# Altium PCB ComBoard2020.PcbDoc
Units mm, origin at the board's own origin, x right, y up, seen from the top; angles counter-clockwise.
Board outline 77.4 x 69.2 mm, 2 copper layers (Top Layer, Bottom Layer), stack 0.325 mm thick; 66 components, 56 nets, 330 pads, 42 vias.
Unrouted connection lines stored in the file: 21.
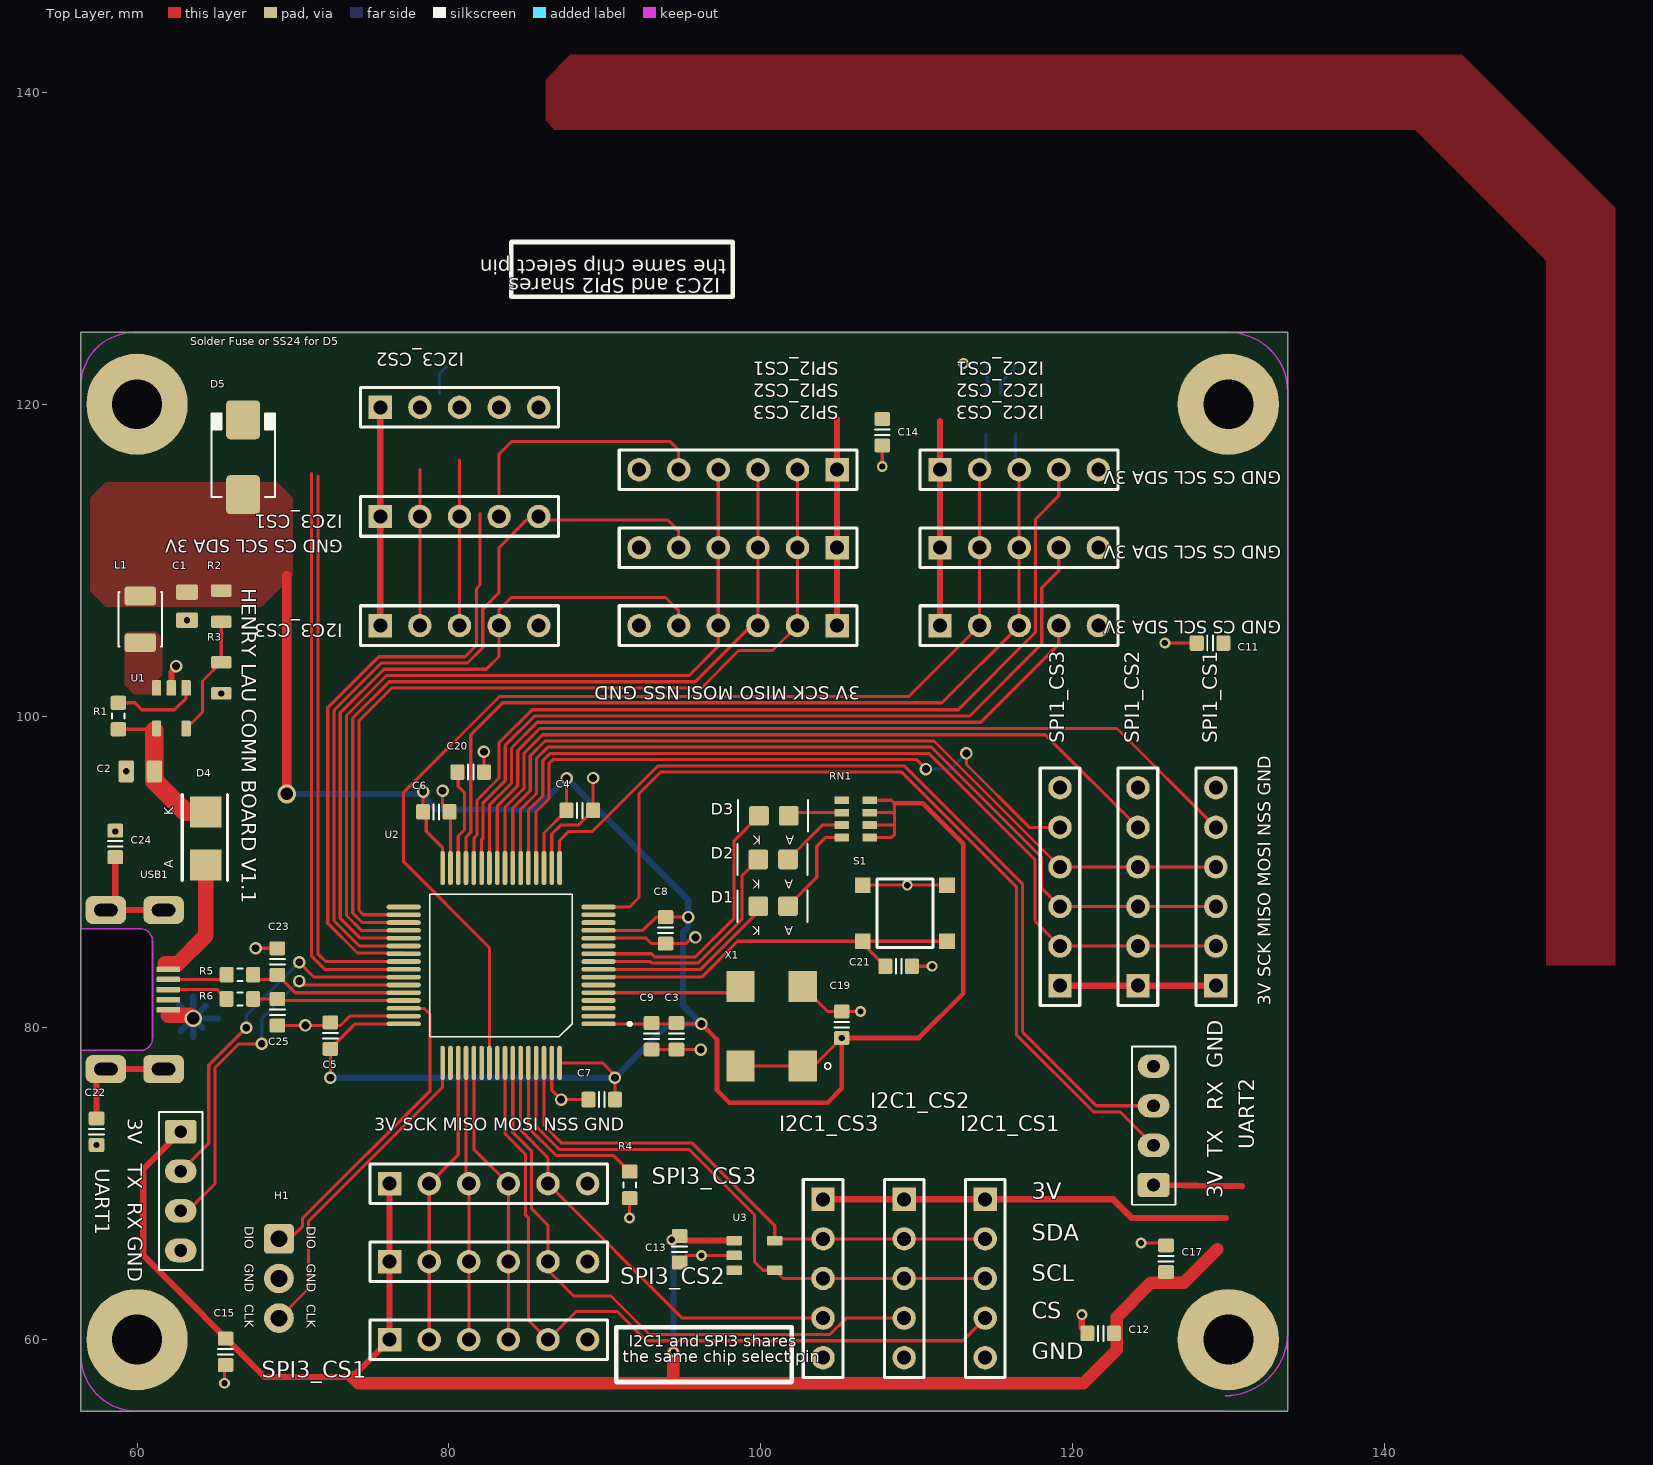
[diagram p0: Top Layer view]
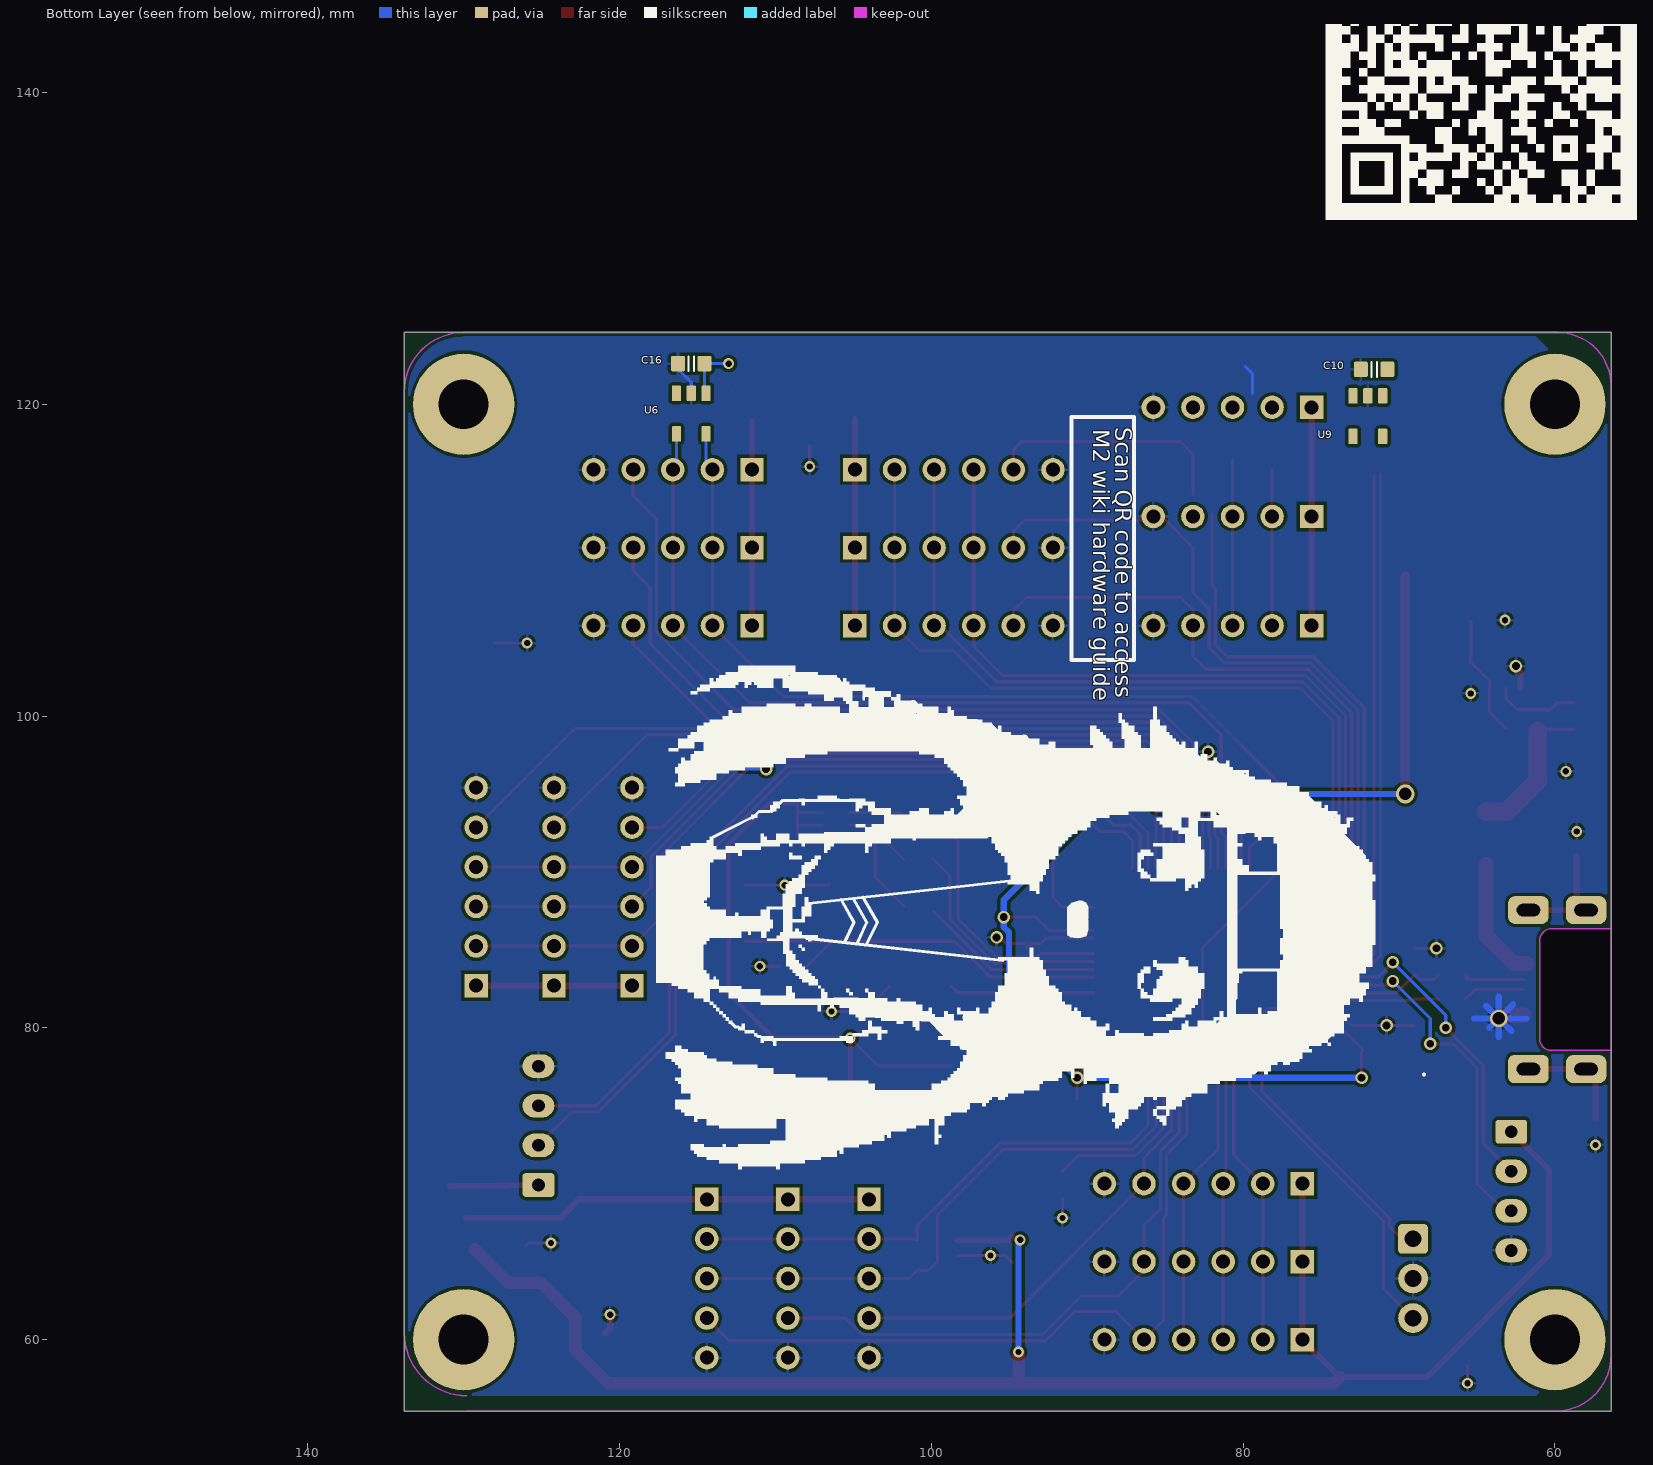
[diagram p1: Bottom Layer view, seen from below]
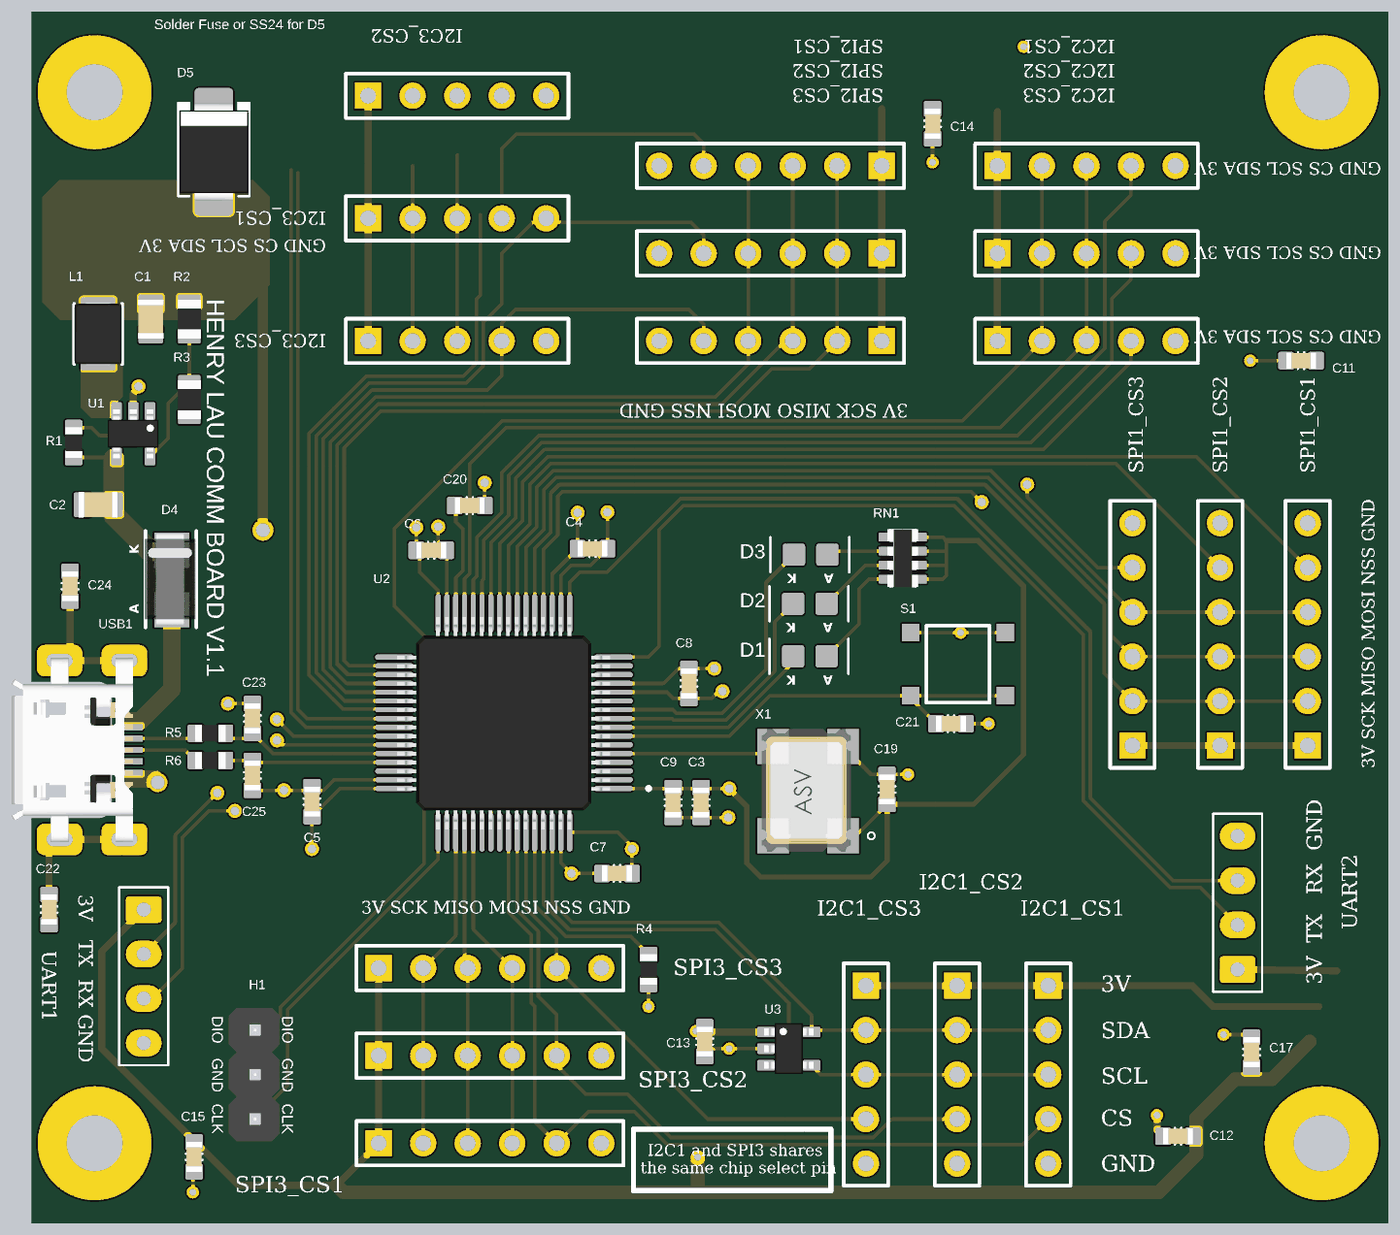
[diagram p2: 3D render of the assembled board from above, using the file's embedded part models]
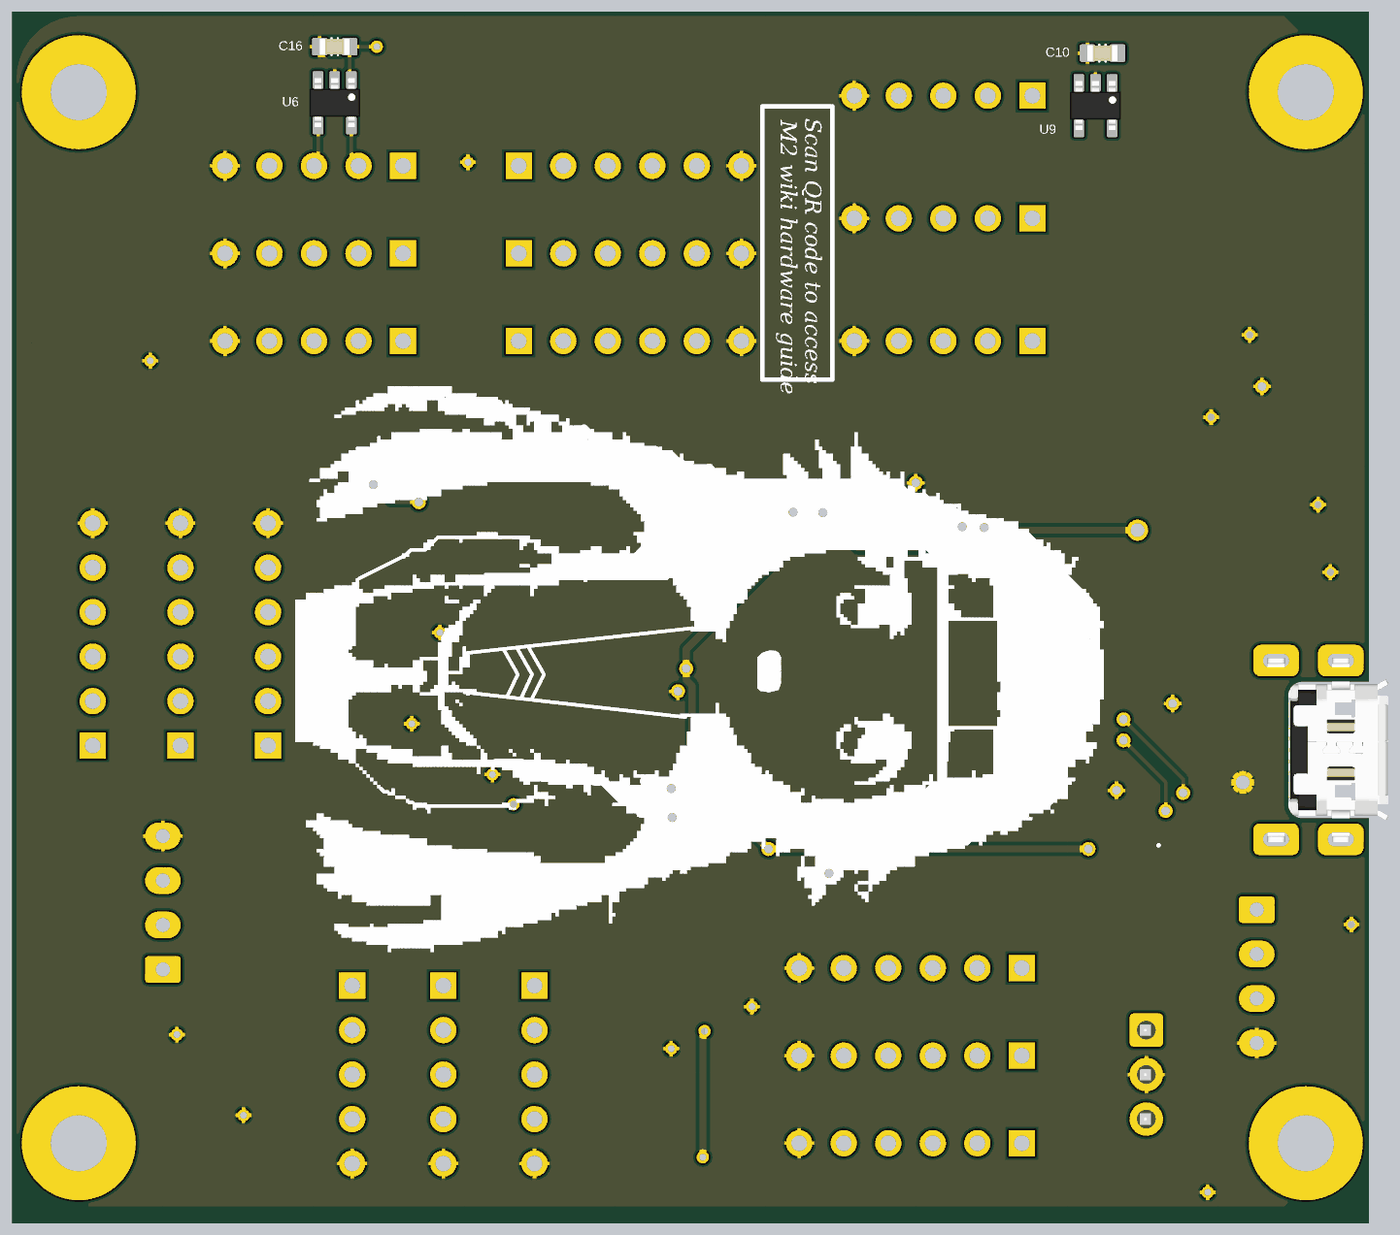
[diagram p3: 3D render of the assembled board from below, using the file's embedded part models]

## Layer stack, top to bottom
Top Solder: solder mask 0.0102, Solder Resist, Dk 3.5
Top Layer: signal copper 0.0356
Dielectric 1: core 0.254, FR-4, Dk 4.2
Bottom Layer: signal copper 0.0356
Bottom Solder: solder mask 0.0102, Solder Resist, Dk 3.5

## Board outline
56.4,124.6 56.4,55.4 133.8,55.4 133.8,124.6

## Design rules (kind name [scope] priority, off if disabled: settings)
Clearance [All] p1: gap=0.2 ignorepadtopadclearanceinfootprint=FALSE
HoleSize [All] p1: absolutevalues=TRUE maxlimit=10 minlimit=0.025 maxpercent=80.000 minpercent=20.000
MinimumSolderMaskSliver [All] p1: minsoldermaskwidth=0.09
PolygonConnect power [InNet('NetL1_1') OR InNet('3V3') OR InComponent('D5')] p1: connectstyle=Direct reliefconductorwidth=0.254 reliefentries=4 polygonreliefangle="90 Angle" airgapwidth=0.254
PolygonConnect [All] p2: connectstyle=Relief reliefconductorwidth=0.2 reliefentries=4 polygonreliefangle="90 Angle" airgapwidth=0.2
RoutingVias [All] p1: holewidth=0.4 width=0.7 viastyle="Through Hole" minholewidth=0.4 minwidth=0.7 maxholewidth=49 maxwidth=50
SilkToSilkClearance [All] p1: silktosilkclearance=0.09
SilkToSolderMaskClearance [IsPad] p1: minsilkscreentomaskgap=0.09 clearancetoexposedcopper=TRUE
SolderMaskExpansion [All] p1: expansion=0.102
Width [All] p1: maxlimit=30 minlimit=0.2 preferedwidth=0.2
26 further rules are at their usual default settings.

## Classes and differential pairs
component class U_STM32F401R: C3 C4 C5 C6 C7 C8 C9 C10 C11 C12 C13 C14 C15 C16 C17 C19 C20 C21 C22 C23 C24 C25 D1 D2 D3 D4 H1 I2C1_CS1 I2C1_CS2 I2C1_CS3 I2C2_CS1 I2C2_CS2 I2C2_CS3 I2C3_CS1 I2C3_CS2 I2C3_CS3 R4 R5 R6 RN1 S1 SPI1_CS1 SPI1_CS2 SPI1_CS3 SPI2_CS1 SPI2_CS2 SPI2_CS3 SPI3_CS1 SPI3_CS2 SPI3_CS3 U2 U3 U6 U9 UART1 UART2 X1
component class U_5V_to_3V3: C1 C2 D5 L1 R1 R2 R3 U1

## Components (designator, comment, footprint, x,y, rotation, side; value= is the part's Value field where it differs from the comment)
C1 "Cap" CAPC2012X135N 63.2,107.049 r90 top value=10u
C2 "Cap" CAPC2012X135N 60.2,96.45 r0 top value=10u
C3 "Cap" CAPC1608X90N 94.599,79.45 r90 top value=1u
C4 "Cap" CAPC1608X90N 88.4,93.945 r180 top value=1u
C5 "Cap" CAPC1608X90N 72.4,79.501 r270 top value=1u
C6 "Cap" CAPC1608X90N 79.2,93.85 r180 top value=1u
C7 "Cap" CAPC1608X90N 89.8,75.4 r0 top value=1u
C8 "Cap" CAPC1608X90N 93.899,86.25 r90 top value=1u
C9 "Cap" CAPC1608X90N 92.999,79.45 r90 top value=0.1u
C10 "Cap" CAPC1608X90N 71.6,122.234 r180 bottom
C11 "Cap" CAPC1608X90N 128.822,104.676 r0 top value=1u
C12 "Cap" CAPC1608X90N 121.8,60.4 r0 top value=1u
C13 "Cap" CAPC1608X90N 94.8,65.8 r90 top value=1u
C14 "Cap" CAPC1608X90N 107.8,118.2 r90 top value=1u
C15 "Cap" CAPC1608X90N 65.676,59.222 r90 top value=1u
C16 "Cap" CAPC1608X90N 115.4,122.6 r180 bottom value=1u
C17 "Cap" CAPC1608X90N 126,65.2 r270 top value=1u
C19 "Cap" CAPC1608X90N 105.2,80.2 r270 top value=0.1u
C20 "Cap" CAPC1608X90N 81.4,96.4 r180 top value=4.7u
C21 "Cap" CAPC1608X90N 108.85,83.95 r180 top value=0.1u
C22 "Cap" CAPC1608X90N 57.4,73.34 r270 top value=0.1u
C23 "Cap" CAPC1608X90N 69,84.25 r90 top value=0.1u
C24 "Cap" CAPC1608X90N 58.6,91.8 r90 top value=0.1u
C25 "Cap" CAPC1608X90N 69,81 r90 top value=0.1u
D1 "LED_Green_GullWing" LED-0805-A 100.799,87.8 r180 top
D2 "LED_Green_GullWing" LED-0805-A 100.799,90.8 r180 top
D3 "LED_Green_GullWing" LED-0805-A 100.846,93.6 r180 top
D4 "MBRA210LT3G" SMA 64.4,90.45 r90 top
D5 "SS24" DO-214AA 66.8,116.6 r90 top
H1 "ST-Link" ST-Link 69.1,66.46 r270 top
I2C1_CS1 "Header 5" HDR1X5 114.401,69 r270 top
I2C1_CS2 "Header 5" HDR1X5 109.201,69 r270 top
I2C1_CS3 "Header 5" HDR1X5 104.001,69 r270 top
I2C2_CS1 "Header 5" HDR1X5 111.5,115.8 r0 top
I2C2_CS2 "Header 5" HDR1X5 111.5,110.8 r0 top
I2C2_CS3 "Header 5" HDR1X5 111.5,105.8 r0 top
I2C3_CS1 "Header 5" HDR1X5 75.6,119.8 r0 top
I2C3_CS2 "Header 5" HDR1X5 75.6,112.8 r0 top
I2C3_CS3 "Header 5" HDR1X5 75.6,105.8 r0 top
L1 "inductor" INDM3225X240N 60.2,106.2 r90 top value=2u2
R1 "Res1" RESC1608X55N 58.8,100 r90 top value=10K
R2 "Res1" RESC2012X70N 65.4,107.049 r90 top value=100K
R3 "Res1" RESC2012X70N 65.4,102.45 r270 top value=22K
R4 "Res1" RESC1608X55N 91.6,69.92 r90 top value=10K
R5 "Res1" RESC1608X55N 66.6,83.4 r180 top value=22R
R6 "Res1" RESC1608X55N 66.6,81.85 r180 top value=22R
RN1 "resistor network" RESCAXS50P160X320X70-8N 106.099,93.4 r180 top value=1K
S1 "SW_THT_PB_4.3mm" TACT_SWT-SMD-4.4 107.05,89.551 r0 top
SPI1_CS1 "Header 6" HDR1X6 129.2,82.7 r90 top
SPI1_CS2 "Header 6" HDR1X6 124.2,82.7 r90 top
SPI1_CS3 "Header 6" HDR1X6 119.2,82.7 r90 top
SPI2_CS1 "Header 6" HDR1X6 104.9,115.8 r180 top
SPI2_CS2 "Header 6" HDR1X6 104.9,110.8 r180 top
SPI2_CS3 "Header 6" HDR1X6 104.9,105.8 r180 top
SPI3_CS1 "Header 6" HDR1X6 76.2,60 r0 top
SPI3_CS2 "Header 6" HDR1X6 76.2,65 r0 top
SPI3_CS3 "Header 6" HDR1X6 76.2,70 r0 top
U1 "TLV62569" SOT23-5 62.2,100.5 r270 top
U2 "STM32F401RxTx" LQFP64 89.601,80.25 r180 top
U3 "LTC1694" SOT23-5 99.6,65.4 r0 top
U6 "LTC1694" SOT23-5 115.4,119.4 r270 bottom
U9 "LTC1694" SOT23-5 72,119.234 r270 bottom
UART1 "Programmer" HDR1X4_2.54MMP 62.8,73.34 r270 top
UART2 "Programmer" HDR1X4_2.54MMP 125.2,69.92 r90 top
USB1 "USB Micro Type B" USB_MICRO-B 56.4,82.45 r270 top
X1 "ASV-8.000MHZ-EJ-T" "ASV SERIES" 102.7,77.55 r90 top

## Footprints (in the part's own frame and the unit in brackets; to place one, negate y for a bottom-side part, rotate by r counter-clockwise, add the part's x,y. Pads: shape width x height; smd on the part's side, far side on the other; paste and mask are expansions set on the pad)
"ASV SERIES" [mm] "Footprint used for ASV SERIES standard clock oscillator"
  rect 2x1.8 smd mask+0.102: 1(0,0) 2(5.1,0) 3(5.1,4) 4(0,4)
  silkscreen extent -0.2,-1.8 0.2,-1.4, body extent -0.9,-0.44 6.1,4.64, height 1.8
CAPC1608X90N [mm] "Chip Capacitor, Body 1.6x0.8mm, EIA 0603, IPC Medium Density"
  round 0.254 on Mech15: 0(0,0)
  rrect25% 0.9x1 smd: 1(-0.85,0) 2(0.85,0)
  Top Layer pour cut-out: -0.6,0.5 -0.4,0.7 0.4,0.7 0.6,0.5 0.6,-0.5 0.4,-0.7 -0.4,-0.7 -0.6,-0.5
  silkscreen extent -0.18,-0.48 0.18,0.48, body extent -0.85,-0.45 0.85,0.45, height 0.89
CAPC2012X135N [mm]
  round 0.254 on Mech15: 0(0,0)
  rrect25% 1x1.4 smd: 1(-0.9,0) 2(0.9,0)
  body extent -1.1,-0.72 1.1,0.73, height 1.34
DO-214AA [mm] "JEDEC DO214 variation AA. SMB"
  round 0.508 on Mech15: 0(0,0)
  rrect25% 2.5x2.2 smd: A(-2.4,0) K(2.4,0)
  silkscreen extent -2.54,-2.03 2.79,2.03, body extent -2.8,-1.97 2.8,1.98, height 2.62
HDR1X4_2.54MMP [mil] "Connector; Header; 4 Position 0.100\" pitch"
  rrect25% 60x80 hole 32: 1(0,0)
  oval 60x80 hole 32: 2(100,0) 3(200,0) 4(300,0)
  silkscreen extent -50,-55 350,55
HDR1X5 [mm] "Connector; Header; 5 Position"
  rect 1.5x1.5 hole 0.9: 1(0,0)
  round 1.5 hole 0.9: 2(2.54,0) 3(5.08,0) 4(7.62,0) 5(10.16,0)
  silkscreen extent -1.27,-1.27 11.43,1.27
HDR1X6 [mm] "Connector; Header; 6 Position"
  rect 1.5x1.5 hole 0.9: 1(0,0)
  round 1.5 hole 0.9: 2(2.54,0) 3(5.08,0) 4(7.62,0) 5(10.16,0) 6(12.7,0)
  silkscreen extent -1.27,-1.27 13.97,1.27
INDM3225X240N [mm] "Molded Inductor, 2-Leads, Body 3.2x2.5mm, IPC Medium Density"
  round 0.508 on Mech15: 0(0,0)
  rrect25% 1.2x2 smd: 1(-1.5,0) 2(1.5,0)
  silkscreen extent -1.75,-1.4 1.75,1.4, body extent -1.79,-1.35 1.79,1.35, height 2.4
LED-0805-A [mil]
  round 20 on Mech15: 0(0,0)
  rrect25% 50x50 smd: A(-37.5,0) K(37.5,0)
  Top Layer pour cut-out: -15,30 15,30 15,-30 -15,-30
  silkscreen extent -87,-39 91,39, body extent -39,-25 39,25, height 31
LQFP64 [mm]
  oval 2.2x0.3 smd: 1(0,0) 2(0,-0.5) 3(0,-1) 4(0,-1.5) 5(0,-2) 6(0,-2.5) 7(0,-3) 8(0,-3.5) 9(0,-4) 10(0,-4.5) 11(0,-5) 12(0,-5.5) 13(0,-6) 14(0,-6.5) 15(0,-7) 16(0,-7.5) 33(12.5,-7.5) 34(12.5,-7) 35(12.5,-6.5) 36(12.5,-6) 37(12.5,-5.5) 38(12.5,-5) 39(12.5,-4.5) 40(12.5,-4) 41(12.5,-3.5) 42(12.5,-3) 43(12.5,-2.5) 44(12.5,-2) 45(12.5,-1.5) 46(12.5,-1) 47(12.5,-0.5) 48(12.5,0)
  oval 0.3x2.2 smd: 17(2.5,-10) 18(3,-10) 19(3.5,-10) 20(4,-10) 21(4.5,-10) 22(5,-10) 23(5.5,-10) 24(6,-10) 25(6.5,-10) 26(7,-10) 27(7.5,-10) 28(8,-10) 29(8.5,-10) 30(9,-10) 31(9.5,-10) 32(10,-10) 49(10,2.5) 50(9.5,2.5) 51(9,2.5) 52(8.5,2.5) 53(8,2.5) 54(7.5,2.5) 55(7,2.5) 56(6.5,2.5) 57(6,2.5) 58(5.5,2.5) 59(5,2.5) 60(4.5,2.5) 61(4,2.5) 62(3.5,2.5) 63(3,2.5) 64(2.5,2.5)
  silkscreen extent -2.1,-8.31 10.81,0.81, body extent 0.2,-9.8 12.34,2.34, height 1.6
RESC1608X55N [mm] "Chip Resistor, Body 1.6x0.8mm, EIA 0603, IPC Medium Density"
  round 0.254 on Mech15: 0(0,0)
  rrect25% 0.9x1 smd: 1(-0.85,0) 2(0.85,0)
  Top Layer pour cut-out: -0.6,0.5 -0.4,0.7 0.4,0.7 0.6,0.5 0.6,-0.5 0.4,-0.7 -0.4,-0.7 -0.6,-0.5
  silkscreen extent -0.15,-0.41 0.15,0.41, body extent -0.87,-0.47 0.88,0.48, height 0.54
RESC2012X70N [mm]
  rrect25% 0.8x1.3 smd: 1(-1,0) 2(1,0)
  body extent -1.1,-0.67 1.1,0.68, height 0.69
RESCAXS50P160X320X70-8N [mm] "Resistor Pack, Body 1.6x3.2mm, 4x0603, IPC Medium Density"
  round 0.254 on Mech15: 0(0,0)
  rrect25% 0.95x0.5 smd: 1(-0.9,1.2) 2(-0.9,0.4) 3(-0.9,-0.4) 4(-0.9,-1.2) 5(0.9,-1.2) 6(0.9,-0.4) 7(0.9,0.4) 8(0.9,1.2)
  Top Layer pour cut-out: -0.4,1.7 0.4,1.7 0.4,-1.7 -0.4,-1.7
  body extent -0.87,-1.68 0.88,1.67, height 0.7
SMA [mm]
  rect 2x2 smd mask+0.102: A(0,0) K(3.4,0)
  silkscreen extent -1,-1.4 4.5,1.5, body extent -0.88,-1.36 4.4,1.56, height 2.41
SOT23-5 [mm]
  rrect25% 1x0.6 smd: 1(-1.3,0.95) 2(-1.3,0) 3(-1.3,-0.95) 4(1.3,-0.95) 5(1.3,0.95)
  body extent -1.4,-1.45 1.4,1.45, height 1.44
ST-Link [mil] "Connector; Header; 3 Position"
  rrect25% 75x75 hole 42: 1(0,0)
  round 75 hole 42: 2(100,0) 3(200,0)
  body extent -50,-57 250,57, height 335
TACT_SWT-SMD-4.4 [mm]
  rect 1x1 smd mask+0.102: 1(-0.5,-4) 1(4.9,-4) 2(-0.5,-0.4) 2(4.9,-0.4)
  silkscreen extent 0.4,-4.4 4,0
USB_MICRO-B [mm]
  round 0.508 on Mech15: 0(0,0)
  rrect20% 0.35x1.5 smd: 1(-1.3,5.6) 2(-0.65,5.6) 3(0,5.6) 4(0.65,5.6) 5(1.3,5.6)
  rrect50% 1.8x2.6 hole 0.8 slot 1.5 at 90 deg: SH(-5.1,5.3) SH(-5.1,1.6) SH(5.1,1.6)
  rrect40% 1.8x2.6 hole 0.8 slot 1.5 at 90 deg: SH(5.1,5.3)
  Keep-Out Layer board cut-out: -3.9,0 -3.9,3.797 -3.839,4.103 -3.666,4.362 -3.406,4.536 -3.1,4.597 -3.1,4.597 3.1,4.597 3.406,4.536 3.666,4.362 3.839,4.103 3.9,3.797 3.9,3.797 3.9,0
  body extent -5.25,-1.12 5.25,5.8, height 2.15

## Part data
C1 C2 C3 C4 C5 C6 C7 C8 C9 C10 C11 C12 C13 C14 C15 C16 C17 C19 C20 C21 C22 C23 C24 C25: "Capacitor", LatestRevisionDate=17-Jul-2002, LatestRevisionNote="Re-released for DXP Platform.", PackageDescription="Radial Cap, Thru-Hole; 2 Leads; 0.3 in Pin Spacing", PackageReference=RAD-0.3, Published=8-Jun-2000, Publisher="Altium Limited"
D1 D2 D3: "LED Gull-wing SMD High-intensity Green 450mcd 574nm", Color=Green, Manufacturer 1=Ligitek, Manufacturer Part Number 1=L8UG9033/TR1, Package / Case="4.6mm Gull-Wing", Ratings="450 mcd; 574 nm", Material=AlGaInP, SCDType=source
D4: "Surface Mount  Schottky Power Rectifier", Manufacturer="ON semiconductor", datasheet=http://www.mouser.com/ds/2/308/MBRA210LT3-D-76406.pdf, If=2A, Vf=350mV, Vrrm=10V
D5: "2.0A SURFACE MOUNT SCHOTTKY BARRIER RECTIFIER", Current=2A, Voltage=40V
H1: "ST-Link header with silkscreen"
I2C1_CS1 I2C1_CS2 I2C1_CS3 I2C2_CS1 I2C2_CS2 I2C2_CS3 I2C3_CS1 I2C3_CS2 I2C3_CS3: "Header, 5-Pin", LatestRevisionDate=17-Jul-2002, LatestRevisionNote="Re-released for DXP Platform.", Publisher="Altium Limited"
L1: library part INDC, "IHLP SMD 4040", link=http://www.mouser.hk/ProductDetail/Panasonic/ETQ-P5M4R7YFC/?qs=sGAEpiMZZMsg%252by3WlYCkUx1BJssUTVH58rrEHsPkNus%3d
R1 R2 R3 R4 R5 R6: "Resistor", LatestRevisionDate=17-Jul-2002, LatestRevisionNote="Re-released for DXP Platform.", PackageDescription="Axial Device, Thru-Hole; 2 Leads; 0.3 in Pin Spacing", PackageReference=AXIAL-0.3, Published=8-Jun-2000, Publisher="Altium Limited"
RN1: library part RES_NET
S1: "Switch, tact, 4.3mm stem", Manufacturer 1=Bond-Tact, Manufacturer Part Number 1=TS-1143-WP-300, Package / Case="6.5x6.5mm; 4.3mm stem", Function=Speed, Material="Brass/Nylon/Ag plating", SCDType=spec
SPI1_CS1 SPI1_CS2 SPI1_CS3 SPI2_CS1 SPI2_CS2 SPI2_CS3 SPI3_CS1 SPI3_CS2 SPI3_CS3: "Header, 6-Pin", LatestRevisionDate=17-Jul-2002, LatestRevisionNote="Re-released for DXP Platform.", Publisher="Altium Limited"
U1: "2-A High Efficiency Synchronous Buck Converter in SOT Package", Manufacturer=TI, Iout(max)=2A, Vin=2.5-5.5V
U3 U6 U9: "SMBus/I2C Accelerator                                Improves SMBus/I2CTM Rise Time Transition / Ensures Data Integrity / on the SMBus/I2C / Improves Low State Noise Margin / Parallel Multiple LTC1694-1 Devices / for Increased Drive", Pull up current=2.2mA, ComponentLink1Description=Datasheet, ComponentLink1URL=https://www.analog.com/media/en/technical-documentation/data-sheets/1694fa.pdf, VCC(max)=5.5V, VCC(min)=2.7V
UART1 UART2: library part Header4P, "Header 4-pin"
USB1: library part USB_Micro_TypeB, "Connector SMD USB Micro Type B middle mount", Manufacturer 1="Molex Inc", Manufacturer Part Number 1=47491-0001, Package / Case=SMD, Supplier Part Number 1=WM17142CT-ND, SCDType=undef, Supplier 1=Digi-Key
X1: "3.3Vdc HCMOS SMD Crystal Clock Oscillator", Frequency=8.000MHz, Manufacturer=Abracon, VDD=3.3V

## Free pads (board coordinates)
  round 6.5 hole 3.2: 5(60,60) 6(60,120) 7(130,120) 8(130,60)

## Via types
v1: diameter 0.8, hole 0.5, Top Layer to Bottom Layer, 21 vias
v2: diameter 0.7, hole 0.4, Top Layer to Bottom Layer, 19 vias
v3: diameter 1.2, hole 0.8, Top Layer to Bottom Layer, 1 vias
v4: diameter 1.1, hole 0.8, Top Layer to Bottom Layer, 1 vias

## Nets (pads, with @x,y where several pads share a name; then routed paths per layer and width w, separated by ;. In a path a pad name is that pad's centre, name@x,y a point inside that pad or via, vN(x,y) a via of type N, cw(c..) or ccw(c..) an arc to the next point about the centre after c; other vN are vias at no path point)
3V3: C1.2 C3.2 C4.2 C5.2 C6.2 C7.2 C8.2 C9.2 C19.2 D5.A L1.2 R2.2 RN1.1 RN1.2 RN1.3 RN1.4 U2.1 U2.13 U2.19 U2.32 U2.48 U2.64 X1.1 X1.4 | length 172
  Top Layer w0.2: v1(72.4,76.8) 72.4,78.45 72.3,78.55 C5.2 74,80.25 U2.48 ; C6.2 v1(78.35,95.15) ; C6.2@78.55,93.85 78.55,92.6 79.601,91.549 U2.32 ; U2.19 86.101,92.496 C4.2 v1(87.55,96) ; U2.64 89.85,77.75 90.65,76.95 v1(90.65,76.8) C7.2 ; U2.1 92.95,80.25 C9.2 93.05,80.351 93.15,80.25 v1(96.2,80.25) ; U2.13 92.444,86.25 93.294,87.1 C8.2 v1(95.35,87.1) ; X1.4 X1.1 103.4,77.55 v2(105.2,79.35) ; RN1.1 108.386,92.2 108.593,92.407 108.593,93 ; RN1.2 108.593,93 ; RN1.3 108.593,93.8 ; RN1.4 108.393,94.6 108.593,94.4 108.593,93.8 ; 108.593,93 108.593,93.8
  Top Layer w0.3: v1(96.2,80.25) 97.2,79.25 97.2,76 98,75.2 104.286,75.2 105.2,76.115 v2(105.2,79.35) 110.15,79.35 113,82.2 113,91.805 110.405,94.4 108.593,94.4
  Top Layer w0.6: v3(69.6,95) 69.6,109
  Bottom Layer w0.4: v3(69.6,95) 78.201,95 v1(78.35,95.15) 78.35,94.85 79.2,94 85.55,94 v1(87.55,96) 95.35,88.2 v1(95.35,87.1) 95.35,86.463 95.019,86.131 95.019,81.432 v1(96.2,80.25) 94.1,80.25 v1(90.65,76.8) v1(72.4,76.8)
3VP: C10.2 C11.2 C12.2 C13.2 C14.2 C15.2 C16.2 C17.2 D5.K I2C1_CS1.1 I2C1_CS2.1 I2C1_CS3.1 I2C2_CS1.1 I2C2_CS2.1 I2C2_CS3.1 I2C3_CS1.1 I2C3_CS2.1 I2C3_CS3.1 SPI1_CS1.1 SPI1_CS2.1 SPI1_CS3.1 SPI2_CS1.1 SPI2_CS2.1 SPI2_CS3.1 SPI3_CS1.1 SPI3_CS2.1 SPI3_CS3.1 U3.1 U6.1 U9.1 UART1.1 UART2.1 | length 198.1
  Top Layer w0.4: UART1.1 60.4,70.94 60.4,65.4 68.2,57.6 73.8,57.6 SPI3_CS1.1 SPI3_CS2.1 SPI3_CS3.1 ; I2C3_CS3.1 I2C3_CS2.1 I2C3_CS1.1 ; C13.2 95.1,66.35 U3.1 ; I2C1_CS3.1 I2C1_CS2.1 I2C1_CS1.1 122.6,69 123.8,67.8 129.83,67.8 ; SPI2_CS3.1 SPI2_CS2.1 SPI2_CS1.1 104.9,119.056 ; I2C2_CS3.1 I2C2_CS2.1 I2C2_CS1.1 111.5,118.9 ; SPI1_CS3.1 SPI1_CS2.1 SPI1_CS1.1 ; UART2.1 130.868,69.84
  Top Layer w0.8: 73.8,57.6 74.2,57.2 94.4,57.2 ; v2(94.4,59.2) 94.4,57.2 ; 129.3,65.8 127.15,63.65 125.05,63.65 122.85,61.45 122.85,59.35 120.7,57.2 94.4,57.2
  Bottom Layer w0.2: v2(113,122.6) C16.2 114.55,120.8 U6.1
  Bottom Layer w0.4: v2(94.3,66.4) 94.4,66.3 v2(94.4,59.2)
5V: C2.2 D4.K R1.1 U1.4 | length 9.7
  Top Layer w0.2: R1.1 U1.4@61.201,99.15
  Top Layer w1.2: U1.4@61.1,99.049 C2.2 61.1,95.85 63.1,93.85 D4.K
GND: C1.1 C2.1 C3.1 C4.1 C5.1 C6.1 C7.1 C8.1 C9.1 C10.1 C11.1 C12.1 C13.1 C14.1 C15.1 C16.1 C17.1 C19.1 C20.1 C21.1 C22.2 C23.2 C24.2 C25.1 H1.2 I2C1_CS1.5 I2C1_CS2.5 I2C1_CS3.5 I2C2_CS1.5 I2C2_CS2.5 I2C2_CS3.5 I2C3_CS1.5 I2C3_CS2.5 I2C3_CS3.5 R3.2 R4.1 S1.2 SPI1_CS1.6 SPI1_CS2.6 SPI1_CS3.6 SPI2_CS1.6 SPI2_CS2.6 SPI2_CS3.6 SPI3_CS1.6 SPI3_CS2.6 SPI3_CS3.6 U1.2 U2.12 U2.18 U2.31 U2.47 U2.63 U3.2 U6.2 U9.2 UART1.4 UART2.4 USB1.5 X1.2 | length 79.4
  Top Layer w0.2: v2(65.6,57.2) 65.6,58.296 C15.1 ; v1(67.6,85.1) C23.2 ; C25.1 v1(70.8,80.15) 73.05,80.15 73.65,80.75 U2.47 ; v1(79.6,95.2) 79.6,94.3 C6.1 ; U2.31 80.101,93.7 C6.1@80.15,93.75 ; C20.1 v1(82.25,97.703) ; U2.63 86.601,75.999 v1(87.2,75.4) C7.1 ; U2.18 86.601,92.43 87.171,93 88.305,93 C4.1 v1(89.25,96.024) ; U2.12 92.643,85.75 92.994,85.4 93.649,85.4 C8.1@93.899,85.15 ; v2(91.594,67.8) 91.594,69.064 R4.1 ; C9.1 C3.1 v1(96.15,78.6) ; C8.1 95.2,85.4 95.6,85.8 v1(95.819,85.8) ; C13.1 95.25,65.4 U3.2 ; X1.2 104.3,81.05 v2(106.4,81.05) ; S1.2@106.55,89.151 S1.2@111.95,89.151 ; v2(107.8,116) C14.1 ; C21.1 v2(111,83.95) ; v2(124.4,66.2) 125.85,66.2 C17.1 ; v2(125.922,104.676) C11.1
  Top Layer w0.3: 62,80.8 USB1.5
  Top Layer w0.4: U1.2 62.2,102.8 62.5,103.1 v1(62.5,103.2) ; v2(120.6,61.6) 120.6,60.75 C12.1
  Top Layer w1: 62,80.8 63.4,80.8 v4(63.6,80.6)
  Bottom Layer w0.2: 79.4,120.7 79.4,121.95 79.85,122.4 ; U6.2 115.4,121.4 116.25,122.25 C16.1
  Bottom Layer w0.4: 61.835,80.6 v4(63.6,80.6) ; 62.682,81.518 v4(63.6,80.6) ; 62.8,79.8 v4(63.6,80.6) ; 63.6,79.411 v4(63.6,80.6) ; 63.6,81.996 v4(63.6,80.6) ; 64.2,80 v4(63.6,80.6) ; 64.4,81.4 v4(63.6,80.6) ; 65.183,80.6 v4(63.6,80.6)
  other v2: 96.2,65.4 57.4,72.49 109.4,89.151 58.6,92.6 59.3,96.45 65.4,101.45 63.2,106.149
I2C1_SCL: I2C1_CS1.3 I2C1_CS2.3 I2C1_CS3.3 U2.61 U3.4 | length 38.7
  Top Layer w0.2: U2.61 85.601,73.665 87.066,72.2 95.4,72.2 99.6,68 99.6,65 100.15,64.45 U3.4 101.43,63.92 I2C1_CS3.3 I2C1_CS2.3 I2C1_CS1.3
I2C1_SDA: I2C1_CS1.2 I2C1_CS2.2 I2C1_CS3.2 U2.62 U3.5 | length 36
  Top Layer w0.2: U2.62 86.101,73.731 87.231,72.6 95.6,72.6 100.9,67.3 U3.5 101.01,66.46 I2C1_CS3.2 I2C1_CS2.2 I2C1_CS1.2
I2C1_SPI3_CS1: I2C1_CS1.4 SPI3_CS1.5 U2.57 | length 49.1
  Top Layer w0.2: U2.57 83.601,73.199 84.91,71.89 84.91,68 85.101,67.809 85.101,61.259 SPI3_CS1.5 88.16,61.8 90.8,61.8 92.67,59.93 112.951,59.93 I2C1_CS1.4
I2C1_SPI3_CS2: I2C1_CS2.4 SPI3_CS2.5 U2.58 | length 39.2
  Top Layer w0.2: U2.58 84.101,73.299 85.31,72.09 85.31,68.391 86.36,67.341 SPI3_CS2.5 86.36,64.44 88,62.8 90.4,62.8 92.87,60.33 104.436,60.33 105.486,61.38 I2C1_CS2.4
I2C1_SPI3_CS3: I2C1_CS3.4 SPI3_CS3.5 U2.59 | length 29.7
  Top Layer w0.2: U2.59 84.601,73.419 86.36,71.659 SPI3_CS3.5 94.98,61.38 I2C1_CS3.4
I2C2_CS1: I2C2_CS1.4 U2.28 | length 57.1
  Top Layer w0.2: U2.28 81.601,92.169 81.8,92.368 81.8,94.604 83.22,96.024 83.22,98.28 85.34,100.4 112.665,100.4 117.63,105.365 117.63,112.63 119.12,114.12 I2C2_CS1.4
I2C2_CS2: I2C2_CS2.4 U2.27 | length 52.2
  Top Layer w0.2: U2.27 82.101,92.103 82.2,92.202 82.2,94.439 83.62,95.858 83.62,98.114 85.506,100 113.4,100 118.03,104.63 118.03,108.23 119.12,109.32 I2C2_CS2.4
I2C2_CS3: I2C2_CS3.4 U2.26 | length 47.3
  Top Layer w0.2: U2.26 82.6,94.273 84.02,95.693 84.02,97.948 85.672,99.6 114.122,99.6 119.12,104.598 I2C2_CS3.4
I2C2_SCL: I2C2_CS1.3 I2C2_CS2.3 I2C2_CS3.3 U2.29 U6.4 | length 59.1
  Top Layer w0.2: U2.29 81.101,92.234 81.4,92.534 81.4,98.8 83.45,100.85 111.63,100.85 I2C2_CS3.3 I2C2_CS2.3 I2C2_CS1.3
  Bottom Layer w0.2: U6.4 116.35,116.03 I2C2_CS1.3
I2C2_SDA: I2C2_CS1.2 I2C2_CS2.2 I2C2_CS3.2 U2.55 U6.5 | length 73.5
  Top Layer w0.2: U2.55 82.601,85.15 77.101,90.65 77.101,95.101 83.25,101.25 109.49,101.25 I2C2_CS3.2 I2C2_CS2.2 I2C2_CS1.2
  Bottom Layer w0.2: I2C2_CS1.2 114.45,116.21 U6.5
I2C3_SCL: I2C3_CS1.3 I2C3_CS2.3 I2C3_CS3.3 U2.41 U9.4 | length 47.8
  Top Layer w0.2: 71.2,115.566 71.2,84.584 72.034,83.75 U2.41 ; I2C3_CS3.3 I2C3_CS2.3 80.68,116.421
I2C3_SDA: I2C3_CS1.2 I2C3_CS2.2 I2C3_CS3.2 U2.40 U9.5 | length 46.4
  Top Layer w0.2: 71.6,115.4 71.6,84.75 72.1,84.25 U2.40 ; I2C3_CS3.2 78.14,110.8 78.14,115.8
I2C3_SPI2_CS1: I2C3_CS1.4 SPI2_CS1.5 U2.39 | length 55.2
  Top Layer w0.2: U2.39 77.101,84.8 74.137,84.8 72.234,86.703 72.234,100.531 75.503,103.8 81.03,103.8 81.77,104.54 81.77,108.17 82,108.4 82,112.999 ; 83.22,114.219 83.22,115.8 83.22,116.8 84.02,117.6 94.2,117.6 94.74,117.06 SPI2_CS1.5
I2C3_SPI2_CS2: I2C3_CS2.4 SPI2_CS2.5 U2.38 | length 50.3
  Top Layer w0.2: U2.38 74.253,85.25 72.634,86.869 72.634,100.366 75.669,103.4 81.196,103.4 82.17,104.374 82.17,106.85 83.22,107.9 83.22,110.8 85,112.58 94.02,112.58 94.74,111.86 SPI2_CS2.5
I2C3_SPI2_CS3: I2C3_CS3.4 SPI2_CS3.5 U2.37 | length 45.6
  Top Layer w0.2: U2.37 74.318,85.75 73.034,87.034 73.034,100.2 75.834,103 82.4,103 83.22,103.82 I2C3_CS3.4 83.22,106.82 84,107.6 93.899,107.6 94.74,106.759 SPI2_CS3.5
LED1: D1.K U2.8 | length 11.8
  Top Layer w0.2: U2.8 92.859,83.75 96.15,83.75 D1.K@99.846,87.446
LED2: D2.K U2.9 | length 14.7
  Top Layer w0.2: U2.9 92.925,84.25 93.025,84.15 95.984,84.15 98.8,86.966 98.8,89.754 D2.K
LED3: D3.K U2.10 | length 17
  Top Layer w0.2: U2.10 92.991,84.75 93.191,84.55 95.819,84.55 98.301,87.032 98.301,92.007 D3.K
NetC20_2: C20.2 U2.30 | length 6.1
  Top Layer w0.2: U2.30 80.601,92.3 81,92.699 81,95.08 80.6,95.48 C20.2@80.6,96
NetC21_2: C21.2 S1.1 U2.7 | length 25.5
  Top Layer w0.2: U2.7 96.216,83.25 98.516,85.551 S1.1@106.55,85.551 ; C21.2 106.55,85.4 S1.1@106.55,85.551 ; S1.1@111.95,85.551 S1.1@106.55,85.551
NetC22_1: C22.1 C24.1 USB1.SH | length 14.5
  Top Layer w0.4: C22.1 57.4,76.75 58,77.35 USB1.SH@61.7,77.35 ; C24.1@58.6,91 C24.1 58.6,88.15 58,87.55 USB1.SH@61.7,87.55
NetD1_A: D1.A RN1.8 | length 6.4
  Top Layer w0.2: D1.A 103.6,89.649 103.6,91.649 104.151,92.2 RN1.8
NetD2_A: D2.A RN1.7 | length 4.4
  Top Layer w0.2: D2.A 103.951,93 RN1.7
NetD3_A: D3.A RN1.6 | length 3.5
  Top Layer w0.2: D3.A 101.999,93.8 RN1.6
NetD4_A: D4.A USB1.1 | length 8.2
  Top Layer w0.2: USB1.1 USB1.1@62.351,83.75
  Top Layer w1: 61.8,84.1 62.6,84.1 64.4,85.9 D4.A
NetL1_1: L1.1 U1.3
NetR1_2: R1.2 U1.1 | length 5.5
  Top Layer w0.2: R1.2 59.849,100.85 60.299,100.4 62.4,100.4 63.15,101.15 U1.1
NetR2_1: R2.1 R3.1 U1.5 | length 7.8
  Top Layer w0.2: U1.5 64.2,100.249 64.2,102.249 R3.1 ; R3.1 R2.1
NetR4_2: R4.2 U2.60 | length 11.8
  Top Layer w0.2: U2.60 85.101,73.599 86.9,71.8 90.57,71.8 R4.2
NetR5_2: R5.2 USB1.2 | length 4
  Top Layer w0.2: USB1.2 65.45,83.1 R5.2 ; R5.2@65.65,83.1 R5.2@65.75,83.2
NetR6_2: R6.2 USB1.3 | length 4
  Top Layer w0.2: USB1.3 65.15,82.45 R6.2
NetU2_5: U2.5 X1.3 | length 9.3
  Top Layer w0.2: U2.5 98.301,82.25 X1.3
SPI1_MISO: SPI1_CS1.3 SPI1_CS2.3 SPI1_CS3.3 U2.22 | length 56.7
  Top Layer w0.2: U2.22 84.601,94.011 85.62,95.03 85.62,97.286 86.334,98 110.954,98 118,90.954 118,88.98 SPI1_CS3.3 SPI1_CS2.3 SPI1_CS1.3
SPI1_MOSI: SPI1_CS1.4 SPI1_CS2.4 SPI1_CS3.4 U2.23 | length 55.4
  Top Layer w0.2: U2.23 84.101,94.076 85.22,95.196 85.22,97.451 86.169,98.4 111.12,98.4 SPI1_CS3.4 SPI1_CS2.4 SPI1_CS1.4
SPI1_NSS1: SPI1_CS1.5 U2.25 | length 56.1
  Top Layer w0.2: U2.25 83.101,94.208 84.42,95.527 84.42,97.783 85.837,99.2 122.86,99.2 SPI1_CS1.5
SPI1_NSS2: SPI1_CS2.5 U2.24 | length 50.2
  Top Layer w0.2: U2.24 83.601,94.142 84.82,95.361 84.82,97.617 86.003,98.8 118.26,98.8 SPI1_CS2.5
SPI1_NSS3: SPI1_CS3.5 U2.20 | length 43
  Top Layer w0.2: U2.20 85.601,93.879 86.42,94.699 86.42,96.954 86.666,97.2 110,97.2 v1(110.6,96.6) ; v1(113.2,97.6) 113.2,96.885 117.226,92.86 SPI1_CS3.5
  Bottom Layer w0.2: v1(110.6,96.6) 112.2,96.6 v1(113.2,97.6)
SPI1_SCK: SPI1_CS1.2 SPI1_CS2.2 SPI1_CS3.2 U2.21 | length 58.1
  Top Layer w0.2: U2.21 85.101,93.945 86.02,94.864 86.02,97.12 86.5,97.6 110.788,97.6 117.6,90.788 117.6,86.84 SPI1_CS3.2 SPI1_CS2.2 SPI1_CS1.2
SPI2_MISO: SPI2_CS1.3 SPI2_CS2.3 SPI2_CS3.3 U2.35 | length 54.5
  Top Layer w0.2: U2.35 74.45,86.75 73.834,87.366 73.834,99.869 76.166,102.2 95.8,102.2 99.4,105.8 SPI2_CS3.3 SPI2_CS2.3 SPI2_CS1.3
SPI2_MOSI: SPI2_CS1.4 SPI2_CS2.4 SPI2_CS3.4 U2.36 | length 53.9
  Top Layer w0.2: U2.36 74.384,86.25 73.434,87.2 73.434,100.034 76,102.6 95.416,102.6 97.28,104.464 SPI2_CS3.4 SPI2_CS2.4 SPI2_CS1.4
SPI2_SCK: SPI2_CS1.2 SPI2_CS2.2 SPI2_CS3.2 U2.34 | length 55.8
  Top Layer w0.2: U2.34 74.515,87.25 74.234,87.531 74.234,99.703 76.331,101.8 96.2,101.8 98.6,104.2 100.76,104.2 SPI2_CS3.2 SPI2_CS2.2 SPI2_CS1.2
SPI3_MISO: SPI3_CS1.3 SPI3_CS2.3 SPI3_CS3.3 U2.52 | length 17.8
  Top Layer w0.2: U2.52 81.101,70.179 SPI3_CS3.3 SPI3_CS2.3 SPI3_CS1.3
SPI3_MOSI: SPI3_CS1.4 SPI3_CS2.4 SPI3_CS3.4 U2.53 | length 18.7
  Top Layer w0.2: U2.53 81.601,72.219 SPI3_CS3.4 SPI3_CS2.4 SPI3_CS1.4
SPI3_SCK: SPI3_CS1.2 SPI3_CS2.2 SPI3_CS3.2 U2.51 | length 18.5
  Top Layer w0.2: SPI3_CS1.2 SPI3_CS2.2 SPI3_CS3.2 80.601,71.861 U2.51
SWCLK: H1.3 U2.49 | length 20.7
  Top Layer w0.2: H1.3 71,63.28 71,67.599 79.601,76.2 U2.49
SWDIO: H1.1 U2.46 | length 20.7
  Top Layer w0.2: H1.1 69.81,66.46 70.6,67.25 70.6,67.765 78.8,75.965 78.8,80.855 78.404,81.25 U2.46
UART1_RX: U2.43 UART1.3 | length 25.8
  Top Layer w0.2: UART1.3 63.26,68.26 65,70 65,77.434 66.537,78.972 v1(68,78.972) ; v1(70.4,83) 70.65,82.75 U2.43
  Bottom Layer w0.2: v1(68,78.972) 68,80.6 v1(70.4,83)
UART1_TX: U2.42 UART1.2 | length 23.6
  Top Layer w0.2: UART1.2 62.805,70.805 64.6,72.6 64.6,77.6 v1(67,80) ; v1(70.4,84.2) 71.35,83.25 U2.42
  Bottom Layer w0.2: v1(67,80) 67,80.8 v1(70.4,84.2)
UART2_RX: U2.17 UART2.3 | length 56.4
  Top Layer w0.2: U2.17 87.101,92.001 87.7,92.6 89.213,92.6 93.413,96.8 109.207,96.8 116.8,89.207 116.8,79.72 121.52,75 UART2.3
UART2_TX: U2.16 UART2.2 | length 58.6
  Top Layer w0.2: U2.16 91.594,87.75 92.2,88.356 92.2,95.021 93.579,96.4 109.041,96.4 116.4,89.041 116.4,79.554 121.354,74.6 123.06,74.6 UART2.2
USB_DN: C23.1 R5.1 U2.44 | length 10.4
  Top Layer w0.2: R5.1 67.75,83.1 68.7,83.1 C23.1 70.149,82.25 U2.44
USB_DP: C25.2 R6.1 U2.45 | length 9.7
  Top Layer w0.2: R6.1 68.999,81.85 69.1,81.75 U2.45
pads on no net: C1.0 C2.0 C3.0 C4.0 C5.0 C6.0 C7.0 C8.0 C9.0 C10.0 C11.0 C12.0 C13.0 C14.0 C15.0 C16.0 C17.0 C19.0 C20.0 C21.0 C22.0 C23.0 C24.0 C25.0 D1.0 D2.0 D3.0 D5.0 L1.0 R1.0 R4.0 R5.0 R6.0 RN1.0 RN1.5 U2.2 U2.3 U2.4 U2.6 U2.11 U2.14 U2.15 U2.33 U2.50 U2.54 U2.56 U3.3 U6.3 U9.3 USB1.0 USB1.4

## Polygon pours and split planes (outlines as drawn)
3VP on Top Layer "3VP_L01_P008" (solid, pour order 8): 71.6,128.8
3VP on Top Layer "3VP_L01_P006" (solid, pour order 6): 86.2,140.8 87.8,142.4 145,142.4 154.8,132.6 154.8,84 150.4,84 150.4,129.2 142,137.6 86.8,137.6 86.2,138.2
3VP on Top Layer "3VP_L01_P004" (solid, pour order 4): 65,120
3V3 on Top Layer "3V3_L01_P002" (solid, pour order 2): 57,114 58,115 69,115 70,114 70,109 68,107 58,107 57,108
NetL1_1 on Top Layer "NETL1_1_L01_P000" (solid, pour order 0): 59.401,105.4 61.201,105.4 61.601,105 61.601,102.601 61.201,102.201 61.201,101.4 59.801,101.4 59.2,102 59.2,102.4 59.201,105.2
GND on Bottom Layer "GND_L02_P010" (solid, pour order 10): 61.5,124.6 131.6,124.6 133.8,122.4 133.8,60 130.2,56.4 61.2,56.4 56.4,61.2 56.4,119.5
no net on Bottom Overlay "NETJ1_2_L01_P-001" (solid): 91.284,87.55 91.284,87.311 91.284,85.944 91.237,85.944 91.1,85.806 90.877,85.787 90.636,85.732 90.425,85.787 90.071,85.878 89.93,86.282 89.93,86.91 89.963,86.944 89.93,86.977 89.93,87.744 90.071,88.026 90.33,88.144 90.573,88.144 90.979,88.026 91.284,87.744
no net on Bottom Overlay "NETJ1_2_L01_P-001" (solid): 89.624,93.647 89.624,94.053 89.827,94.256 91.249,94.256 91.249,93.647
no net on Bottom Overlay "NETJ1_2_L01_P-001" (solid): 90.945,93.444 90.945,93.85 91.148,94.053 92.57,94.053 92.57,93.444
no net on Bottom Overlay "NETJ1_2_L01_P-001" (solid): 93.18,93.444 93.18,93.85 93.383,94.053 94.805,94.053 94.805,93.444
no net on Bottom Overlay "NETJ1_2_L01_P-001" (solid): 93.27,93.672
no net on Bottom Overlay "NETJ1_2_L01_P-001" (solid): 98.959,92.555 98.959,93.266 99.162,93.469 102.617,93.469 102.82,93.266 102.82,92.656 100.686,92.656 100.585,92.555
no net on Bottom Overlay "NETJ1_2_L01_P-001" (solid): 97.74,94.282 99.467,92.555 106.884,92.555 106.884,91.234 106.274,91.844 104.852,91.844 104.547,92.148 96.419,92.148 94.895,93.672 94.895,94.282
no net on Bottom Overlay "NETJ1_2_L01_P-001" (solid): 97.943,74.978 99.975,74.978 99.975,75.587 99.162,76.4 97.13,76.4 96.724,76.807 93.676,76.807 93.27,76.4 93.27,75.994 96.114,75.994 96.318,75.791
no net on Bottom Overlay "NETJ1_2_L01_P-001" (solid): 103.226,72.743 105.258,72.743 105.258,74.165 103.226,74.165
no net on Bottom Overlay "NETJ1_2_L01_P-001" (solid): 112.574,71.524 110.948,71.524 110.745,71.32 109.119,71.32 108.51,71.93 106.274,71.93 106.274,72.743 105.868,73.149 105.868,73.759 107.494,73.759 107.9,73.352 108.306,73.352 109.526,72.133 112.37,72.133 112.574,71.93
no net on Bottom Overlay "NETJ1_2_L01_P-001" (solid): 112.574,73.759 110.338,73.759 109.729,74.368 102.414,74.368 101.804,73.759 100.788,73.759 99.366,75.181 99.366,75.486 99.467,75.588 99.67,75.384 104.852,75.384 105.055,75.588 112.575,75.588
no net on Bottom Overlay "NETJ1_2_L01_P-001" (solid): 75.794,95.095 75.794,94.892 74.982,94.079 74.778,94.079 73.762,93.063 73.762,92.453 73.559,92.453 72.137,91.031 72.137,88.796 72.746,88.796 72.746,87.983 72.95,87.78 72.95,83.919 74.575,82.293 74.575,80.871 75.794,80.871 76.404,81.48 76.404,93.266 76.81,93.672 76.81,94.282
no net on Bottom Overlay "NETJ1_2_L01_P-001" (solid): 75.794,95.095
no net on Bottom Overlay "NETJ1_2_L01_P-001" (solid): 73.762,80.668 81.281,80.668 82.094,79.855 83.719,79.855 84.126,79.448 85.548,79.448 85.751,79.245 86.564,79.245 86.97,78.839 86.97,77.62 84.938,75.588 83.719,75.588 82.703,76.604 81.89,76.604 81.484,77.01 79.267,77.01 78.454,77.823 76.81,77.823 75.794,78.839 75.388,78.839 75.185,79.042 74.778,79.042 73.762,80.058
no net on Bottom Overlay "NETJ1_2_L01_P-001" (solid): 85.142,93.901 81.713,93.901 80.313,92.501 78.775,92.501 78.775,95.873 78.741,95.908 80.468,95.908 81.687,97.127 82.5,97.127 83.313,97.94 88.963,97.94 96.724,97.94 96.724,93.901
no net on Bottom Overlay "NETJ1_2_L01_P-001" (solid): 76.81,91.844 77.623,91.844 81.281,95.501 81.281,96.314 79.96,96.314 79.147,95.501 76.81,95.501
no net on Bottom Overlay "NETJ1_2_L01_P-001" (solid): 114.89,73.352
no net on Bottom Overlay "NETJ1_2_L01_P-001" (solid): 109.322,74.368 109.322,74.775 114.606,74.775 114.606,74.368

## Keep-outs
Keep-Out Layer:
  lines w0.1: 60.188,86.35 cw(c60.212,85.587) 60.975,85.611 60.981,85.4 60.981,79.296 ; 60.206,78.544 ccw(c60.229,79.296) 60.981,79.273 ; 60.212,86.35 56.4,86.35 56.4,121.186 cw(c59.814,121.186) 59.814,124.6 130.003,124.6 ; 60.229,78.55 56.4,78.55 56.4,59 ccw(c60,59) 60,55.4 129.8,55.4 ; 129.8,56.4 ccw(c129.8,60.4) 133.8,60.4 133.8,120.803 ; 130.007,124.6 cw(c130.007,120.803) 133.803,120.803

## Silkscreen, mask and mechanical layers (free items; w line width, h text height)
Top Overlay:
  lines w0.3: 84,126.886 88.114,126.886 98.2,126.886 98.2,130.4 84,130.4 84,126.886 ; 90.74,57.286 102,57.286 102,60.8 100.426,60.8 90.74,60.8 90.74,57.286
  text "the same chip select pin" at 97.8,129.6 h1.6 r180
  text "I2C3 and SPI2 shares" at 97.4,128.4 h1.6 r180
  text "Solder Fuse or SS24 for D5" at 63.4,123.6 h0.9
  text "GND CS SCL SDA 3V" at 133.4,116 h1.4 r180
  text "GND CS SCL SDA 3V" at 73.2,111.6 h1.4 r180
  text "GND CS SCL SDA 3V" at 133.4,111.2 h1.4 r180
  text "HENRY LAU COMM BOARD V1.1" at 66.4,108.2 h1.6 r270
  text "GND CS SCL SDA 3V" at 133.4,106.4 h1.4 r180
  text "3V SCK MISO MOSI NSS GND" at 106.4,102.2 h1.5 r180
  text "3V SCK MISO MOSI NSS GND" at 133,81.4 h1.4 r90
  text "3V   TX  RX GND" at 59.076,74.2 h1.6 r270
  text "3V SCK MISO MOSI NSS GND" at 75.2,73.118 h1.4
  text "3V  TX   RX  GND" at 130,69.07 h1.7 r90
  text "3V" at 117.4,68.65 h1.8
  text "SDA" at 117.4,66 h1.8
  text "SCL" at 117.4,63.4 h1.8
  text "CS" at 117.4,61 h1.8
  text "I2C1 and SPI3 shares" at 91.54,59.286 h1.3
  text "GND" at 117.4,58.4 h1.8
  text "the same chip select pin" at 91.14,58.286 h1.3
Bottom Overlay:
  drawing of 433 lines, arcs and shapes, not listed
  text "Scan QR code to access" at 88.556,118.519 h1.8 r90
  text "M2 wiki hardware guide" at 89.956,118.4 h1.8 r90

## Text inside footprints (layer, text, board x,y; h text height)
D1: Top Overlay "A" at 102.099,86.7 h1 r180; Top Overlay "K" at 99.999,86.7 h1 r180
D2: Top Overlay "A" at 102.099,89.7 h1 r180; Top Overlay "K" at 99.999,89.7 h1 r180
D3: Top Overlay "A" at 102.146,92.5 h1 r180; Top Overlay "K" at 100.046,92.5 h1 r180
D4: Top Overlay "K" at 62.5,93.65 h1 r90; Top Overlay "A" at 62.5,90.25 h1 r90
H1: Top Overlay "CLK" at 66.7,62.26 h1 r270; Top Overlay "DIO" at 66.7,67.26 h1 r270; Top Overlay "GND" at 66.7,64.86 h1 r270; Top Overlay "GND" at 70.7,64.86 h1 r270; Top Overlay "DIO" at 70.7,67.26 h1 r270; Top Overlay "CLK" at 70.7,62.26 h1 r270